# Altium PCB RP2040_Evaluation.PcbDoc
Units mil, origin at the board's own origin, x right, y up, seen from the top; angles counter-clockwise.
Board outline 4000 x 4000 mil, 4 copper layers (Top Layer, Middle 1 Layer, Middle 2 Layer, Bottom Layer), stack 23.8 mil thick; 1 components, 6 nets, 61 pads, 0 vias.
Unrouted connection lines stored in the file: 11.
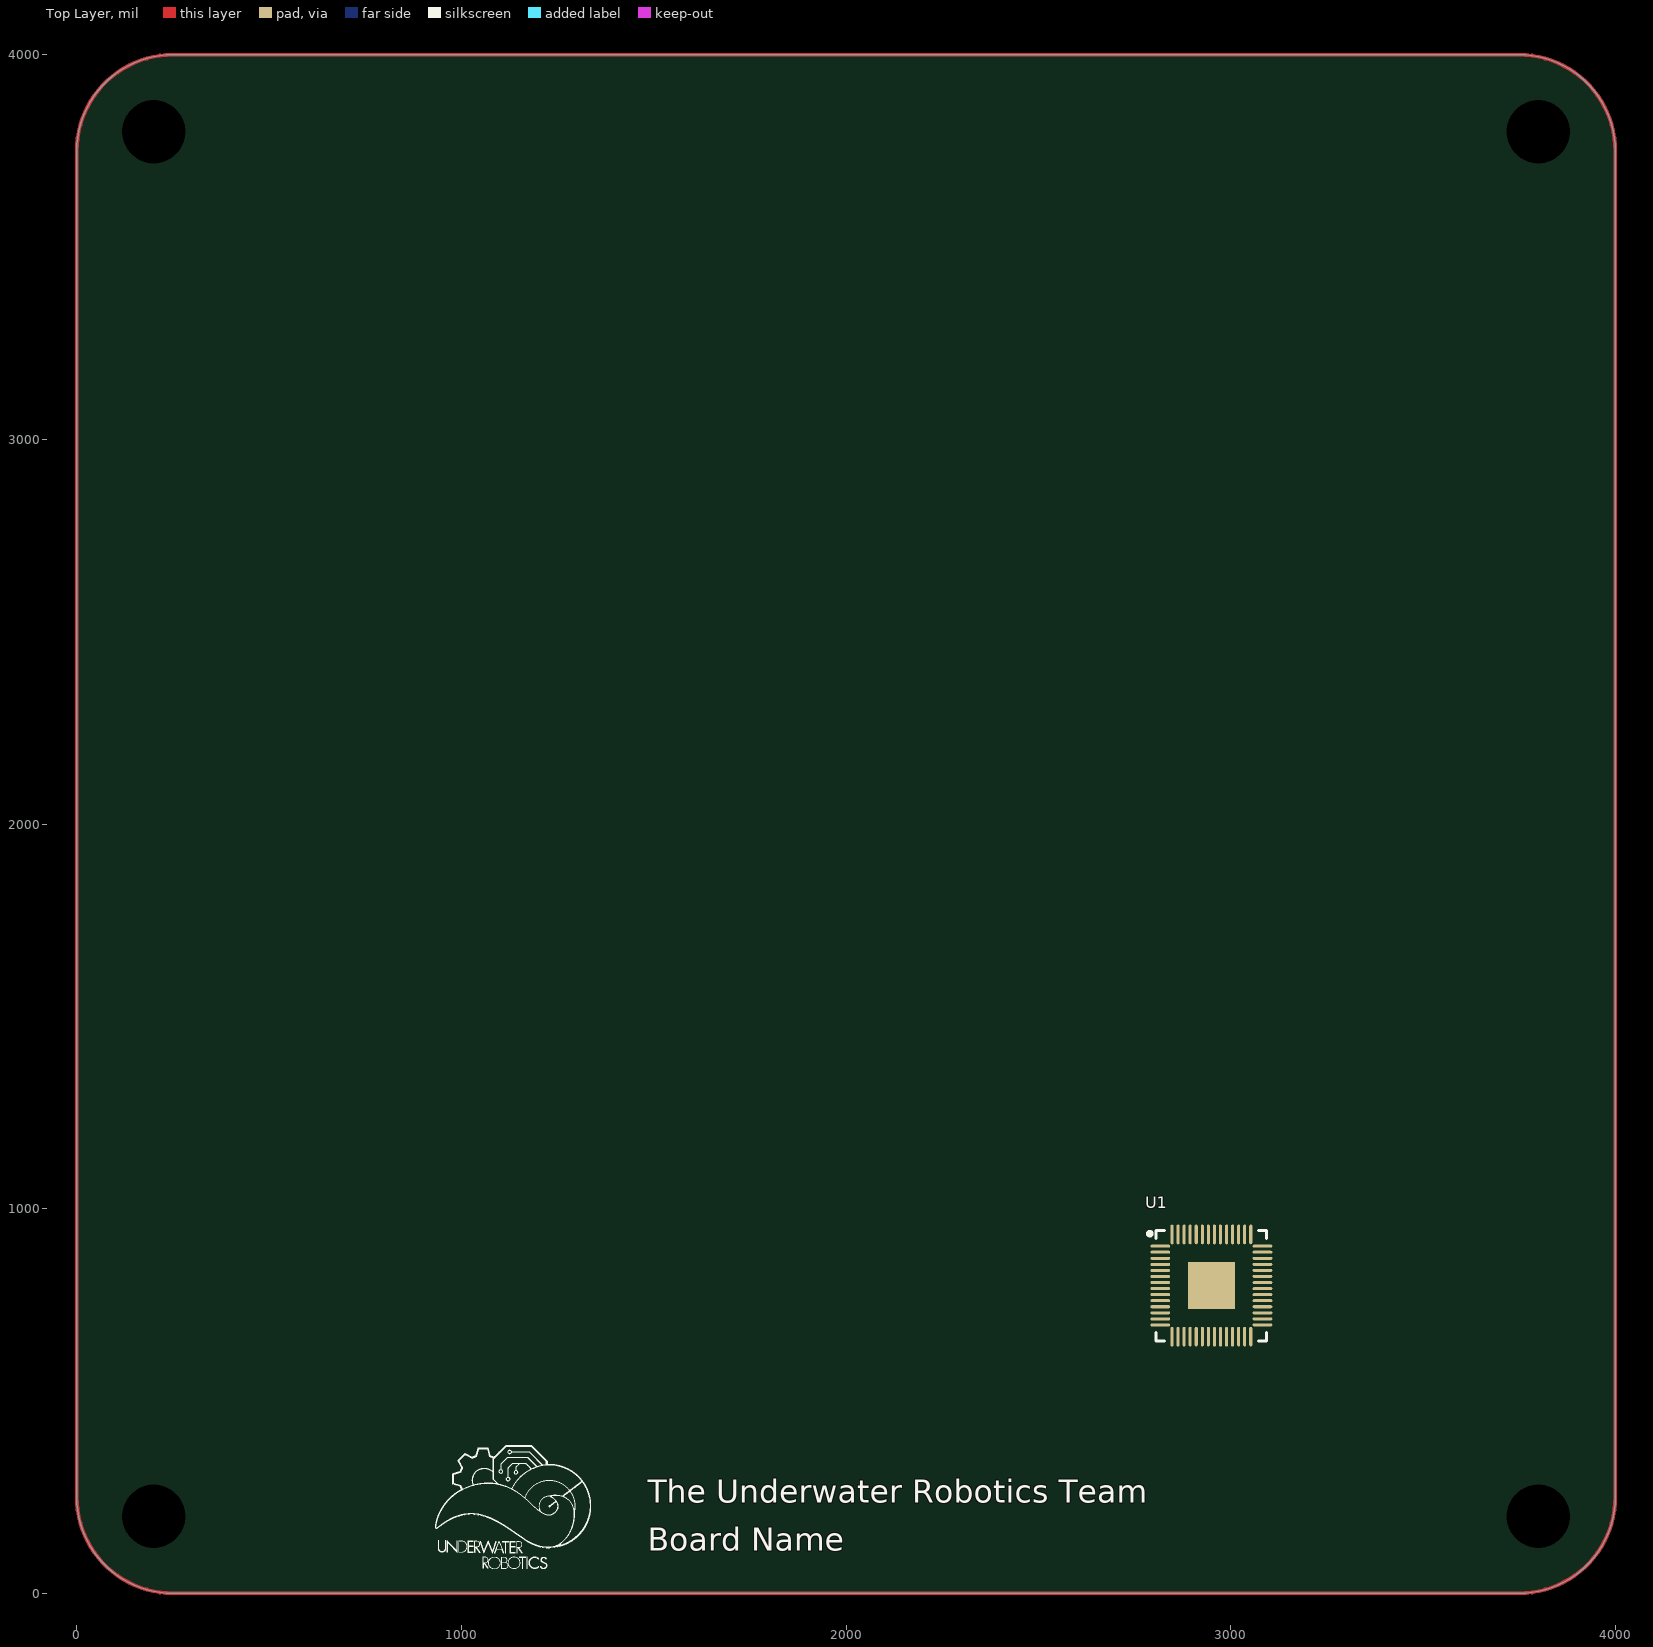
[diagram p0: Top Layer view]
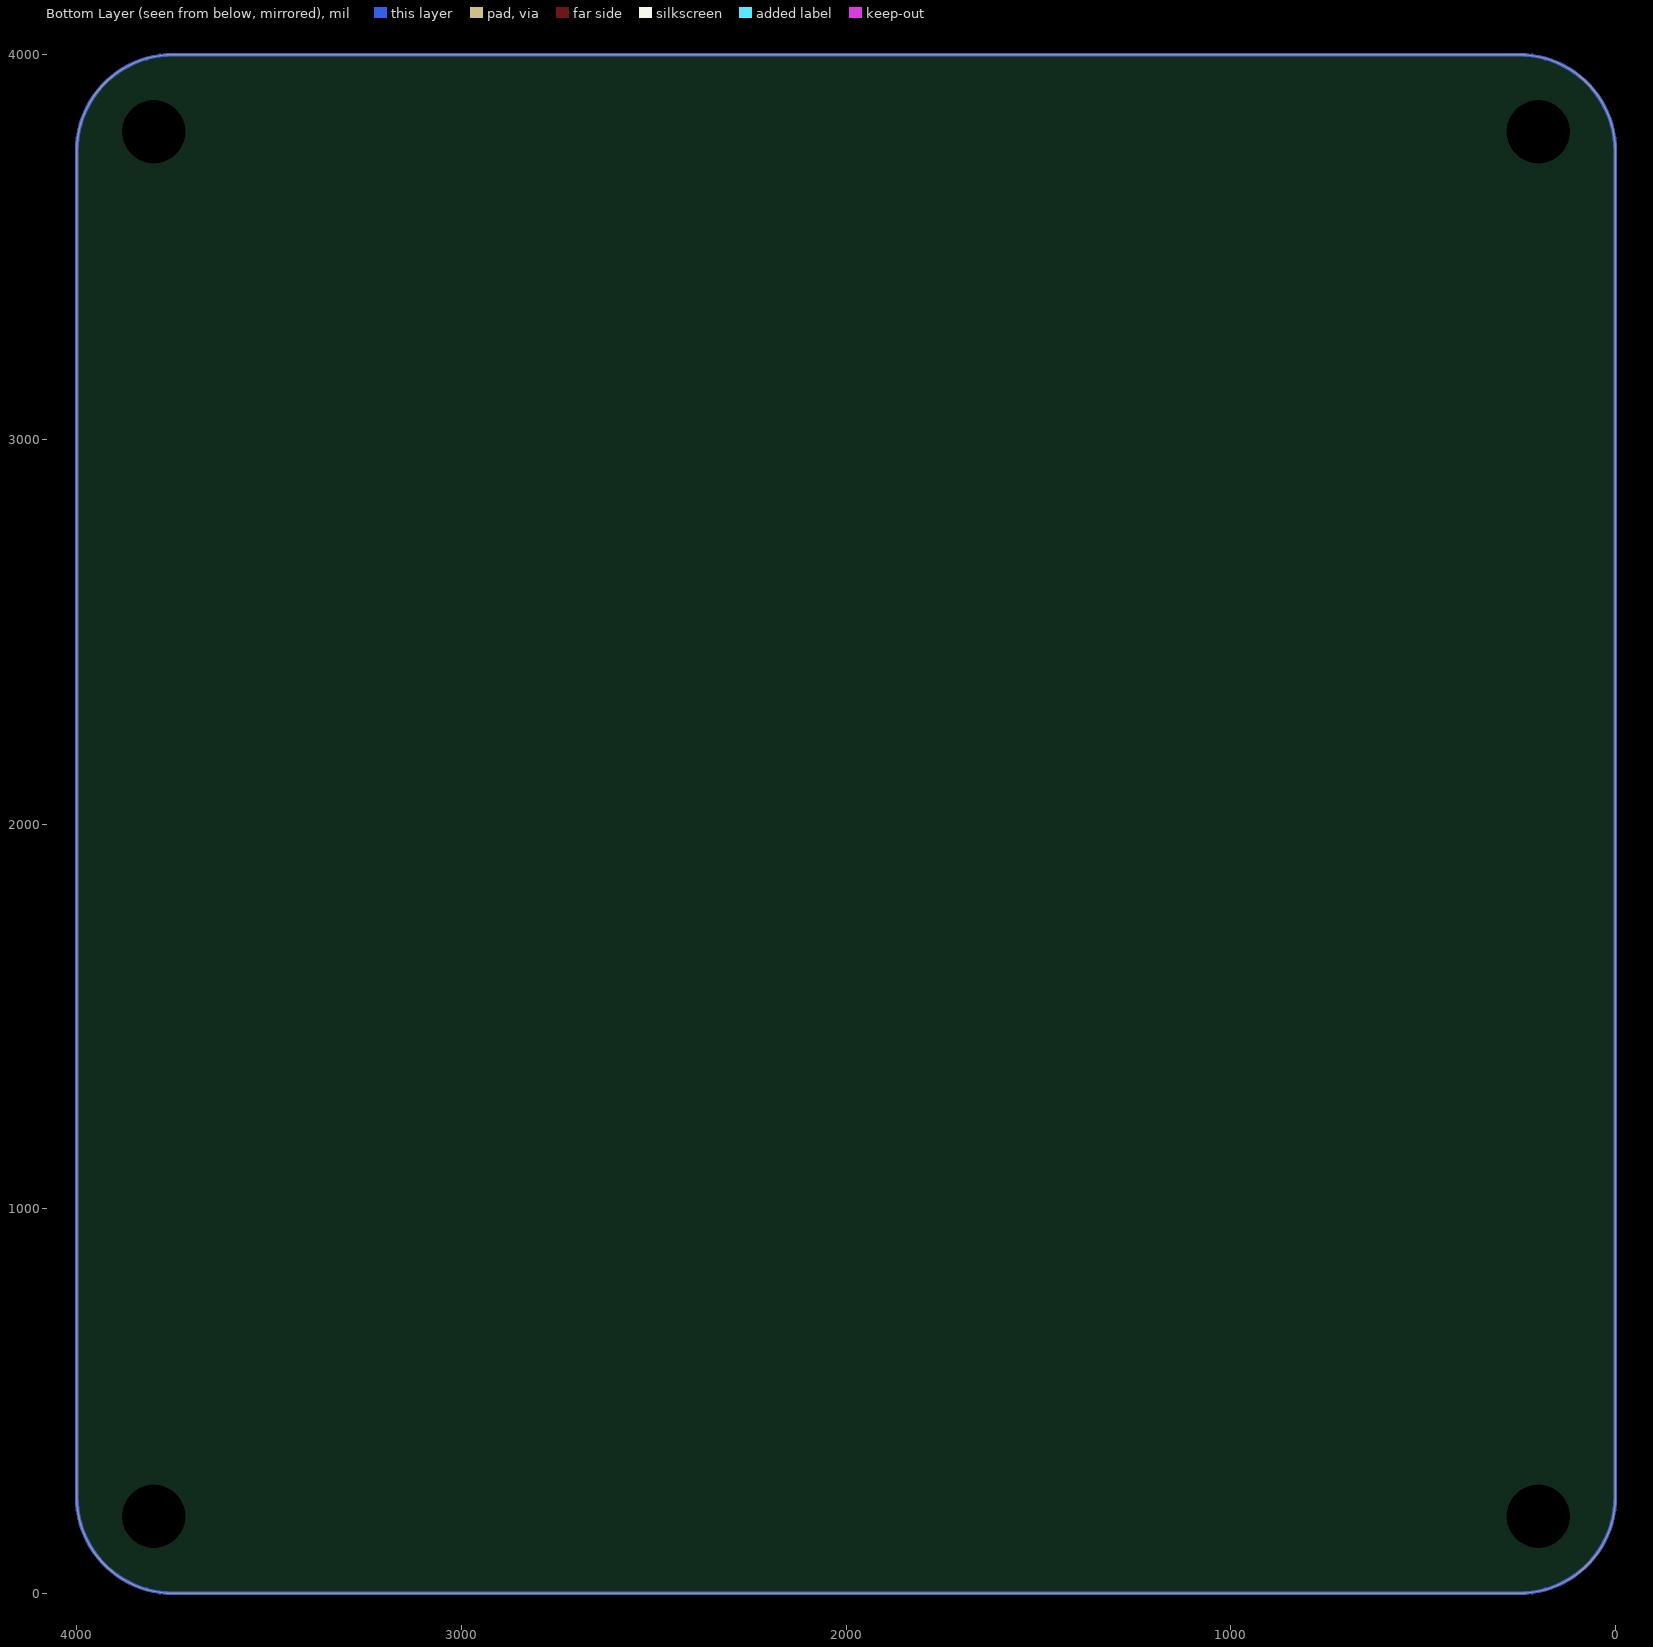
[diagram p1: Bottom Layer view, seen from below]

## Layer stack, top to bottom
Top Solder: solder mask 0.4, Solder Resist, Dk 3.5
Top Layer: signal copper 1.4
Dielectric 1: prepreg 2.8, PP-006, Dk 4.1
Middle 1 Layer: signal copper 1.4
Dielectric 2: dielectric 12.6, FR-4, Dk 4.8
Middle 2 Layer: signal copper 1.4
Dielectric 3: prepreg 2.8, PP-006, Dk 4.1
Bottom Layer: signal copper 1.4
Bottom Solder: solder mask 0.4, Solder Resist, Dk 3.5

## Board outline
0,250 0,3750 cw(c250,3750) 250,4000 3750,4000 cw(c3750,3750) 4000,3750 4000,250 cw(c3750,250) 3750,0 250,0 cw(c250,250)

## Design rules (kind name [scope] priority, off if disabled: settings)
AcuteAngle [All] p1: minimum=9.00000000000000E+0001 checktracksonly=FALSE
BoardOutlineClearance [All] p1: gap=15 ignorepadtopadclearanceinfootprint=FALSE
Clearance "Clearance JLCPCB" [All] p1: gap=6 ignorepadtopadclearanceinfootprint=FALSE except(5: SMDPad-SMDPad; 10: Arc-Via Arc-Hole Track-Via Track-Hole Via-Via Via-Fill Via-Poly Via-Region Fill-Hole Poly-Hole Region-Hole; 13: Arc-THPad Track-THPad THPad-Fill THPad-Poly THPad-Region; 20: THPad-THPad)
ComponentOrientations [All] p1: allowedrotations=32
DiffPairsRouting "USB 2.0" [InDifferentialPairClass('USB 2.0')] p1: maxlimit=6 minlimit=6 mostfreqgap=6 toplayer_minwidth=15 toplayer_maxwidth=15 toplayer_prefwidth=15 midlayer1_minwidth=2.53 midlayer1_maxwidth=2.53 midlayer1_prefwidth=2.53 midlayer2_minwidth=2.53 midlayer2_maxwidth=2.53 midlayer2_prefwidth=2.53 bottomlayer_minwidth=15 bottomlayer_maxwidth=15 bottomlayer_prefwidth=15 impedanceprofiledriven=TRUE impedanceprofileid={B279FAB8-9179-4BDF-8125-EF1A8961339F} impedanceprofilevalue=90.000000 maxuncoupledlength=500
DiffPairsRouting [All] p2: maxlimit=10 minlimit=10 mostfreqgap=10 toplayer_minwidth=15 toplayer_maxwidth=15 toplayer_prefwidth=15 midlayer1_minwidth=15 midlayer1_maxwidth=15 midlayer1_prefwidth=15 midlayer2_minwidth=15 midlayer2_maxwidth=15 midlayer2_prefwidth=15 bottomlayer_minwidth=15 bottomlayer_maxwidth=15 bottomlayer_prefwidth=15 maxuncoupledlength=500
FanoutControl Fanout_Default [All] p5: bgadir=Out bgaviamode=Centered fanoutstyle=Auto fanoutdirection=OutOnly viagrid=1 // Fanout_Default (Default Rule)
HoleSize "HoleSize JLCPCB" [All] p1: absolutevalues=TRUE maxlimit=245 minlimit=8 maxpercent=80.000 minpercent=20.000
HoleToHoleClearance "HoleToHoleClearance JLCPCB" [All] p1: gap=20 allowstackedmicrovias=TRUE
MinimumAnnularRing "MinimumAnnularRing JLCPCB" [All] p1: minimumring=6
MinimumSolderMaskSliver "MinimumSolderMaskSliver JLCPCB" [All] p1: minsoldermaskwidth=10
PasteMaskExpansion [All] p1: expansion=1
PolygonConnect [All] p1: connectstyle=Relief reliefconductorwidth=10 reliefentries=4 polygonreliefangle="90 Angle" airgapwidth=10
RoomDefinition RP2040_Evaluation_Design [InComponentClass('RP2040_Evaluation_Design')] p1: confinementstyle=ConfineIn formatcopy=TRUE lockcomponents=FALSE outline 2750,600 3150,600 3150,1050 2750,1050
RoutingLayers [All] p1: top layer_v5=TRUE mid layer 1_v5=FALSE mid layer 2_v5=FALSE bottom layer_v5=TRUE
RoutingVias "RoutingVias JLCPCB" [All] p1: holewidth=10 width=22 viastyle="Through Hole" minholewidth=8 minwidth=20 maxholewidth=28 maxwidth=40
SMDEntry [All] p1: side=TRUE corner=TRUE anyangle=FALSE
SMDToCorner [All] p1: distance=0
SMDToPlane [All] p1: distance=0
SilkToSilkClearance "SilkToSilkClearance JLCPCB" [All] p1: silktosilkclearance=10
SilkToSolderMaskClearance "SilkToSolderMaskClearance JLCPCB" [IsPad] p1: minsilkscreentomaskgap=6 clearancetoexposedcopper=TRUE
SolderMaskExpansion [All] p1: expansion=4 istentingtop=FALSE
UnRoutedNet [All] p1: checkbadconnections=TRUE
Width "Width JLCPCB" [All] p1: maxlimit=100 minlimit=6 preferedwidth=10
20 further rules are at their usual default settings.

## Classes and differential pairs
differential pair class "USB 2.0": USB
differential pair USB: +USB_P -USB_N

## Components (designator, comment, footprint, x,y, rotation, side; value= is the part's Value field where it differs from the comment)
U1 "RP2040" "QFN-56 RP2040" 2950,800 r0 top

## Footprints (in the part's own frame and the unit in brackets; to place one, negate y for a bottom-side part, rotate by r counter-clockwise, add the part's x,y. Pads: shape width x height; smd on the part's side, far side on the other; paste and mask are expansions set on the pad)
"QFN-56 RP2040" [mm] "QFN, 56-Leads, Body 7.00x7.00mm, Pitch 0.40mm, Thermal Pad 3.10x3.10mm, IPC Medium Density"
  oval 1.3x0.2 smd: 1(-3.375,2.6) 2(-3.375,2.2) 3(-3.375,1.8) 4(-3.375,1.4) 5(-3.375,1) 6(-3.375,0.6) 7(-3.375,0.2) 8(-3.375,-0.2) 9(-3.375,-0.6) 10(-3.375,-1) 11(-3.375,-1.4) 12(-3.375,-1.8) 13(-3.375,-2.2) 14(-3.375,-2.6) 29(3.375,-2.6) 30(3.375,-2.2) 31(3.375,-1.8) 32(3.375,-1.4) 33(3.375,-1) 34(3.375,-0.6) 35(3.375,-0.2) 36(3.375,0.2) 37(3.375,0.6) 38(3.375,1) 39(3.375,1.4) 40(3.375,1.8) 41(3.375,2.2) 42(3.375,2.6)
  oval 0.2x1.3 smd: 15(-2.6,-3.375) 16(-2.2,-3.375) 17(-1.8,-3.375) 18(-1.4,-3.375) 19(-1,-3.375) 20(-0.6,-3.375) 21(-0.2,-3.375) 22(0.2,-3.375) 23(0.6,-3.375) 24(1,-3.375) 25(1.4,-3.375) 26(1.8,-3.375) 27(2.2,-3.375) 28(2.6,-3.375) 43(2.6,3.375) 44(2.2,3.375) 45(1.8,3.375) 46(1.4,3.375) 47(1,3.375) 48(0.6,3.375) 49(0.2,3.375) 50(-0.2,3.375) 51(-0.6,3.375) 52(-1,3.375) 53(-1.4,3.375) 54(-1.8,3.375) 55(-2.2,3.375) 56(-2.6,3.375)
  rect 3.1x3.1 smd: 57(0,0)
  silkscreen extent -4.19,-3.65 3.65,3.65, body extent -3.52,-3.52 3.52,3.52, height 0.85

## Part data
U1: "Raspberry Pi RP2040", ComponentLink1Description=DigiKey

## Free pads (board coordinates)
  round 60 hole 165: 1(200,200) 1(200,3800) 1(3800,200) 1(3800,3800)

## Nets (pads, with @x,y where several pads share a name; then routed paths per layer and width w, separated by ;. In a path a pad name is that pad's centre, name@x,y a point inside that pad or via, vN(x,y) a via of type N, cw(c..) or ccw(c..) an arc to the next point about the centre after c; other vN are vias at no path point)
1V1_MCU: U1.23 U1.45 U1.50
3V3_MCU: U1.1 U1.10 U1.22 U1.33 U1.42 U1.43 U1.44 U1.48 U1.49
GND: U1.19 U1.57
NetU1_26: U1.26
USB_N: U1.46
USB_P: U1.47
pads on no net: U1.2 U1.3 U1.4 U1.5 U1.6 U1.7 U1.8 U1.9 U1.11 U1.12 U1.13 U1.14 U1.15 U1.16 U1.17 U1.18 U1.20 U1.21 U1.24 U1.25 U1.27 U1.28 U1.29 U1.30 U1.31 U1.32 U1.34 U1.35 U1.36 U1.37 U1.38 U1.39 U1.40 U1.41 U1.51 U1.52 U1.53 U1.54 U1.55 U1.56

## Other copper
Multi-Layer:
  the board outline again, w10

## Silkscreen, mask and mechanical layers (free items; w line width, h text height)
Top Overlay:
  drawing of 19 lines, arcs and shapes, not listed
  text "The Underwater Robotics Team" at 1485,235 h60
  text "Board Name" at 1485,110 h60